# Altium PCB PCB_连接板_2_2022-10-20.pcbdoc
Units mil, origin at the board's own origin, x right, y up, seen from the top; angles counter-clockwise.
Board outline 5810 x 5730 mil, 2 copper layers (Top Layer, Bottom Layer); 67 components, 53 nets, 216 pads, 6 vias.
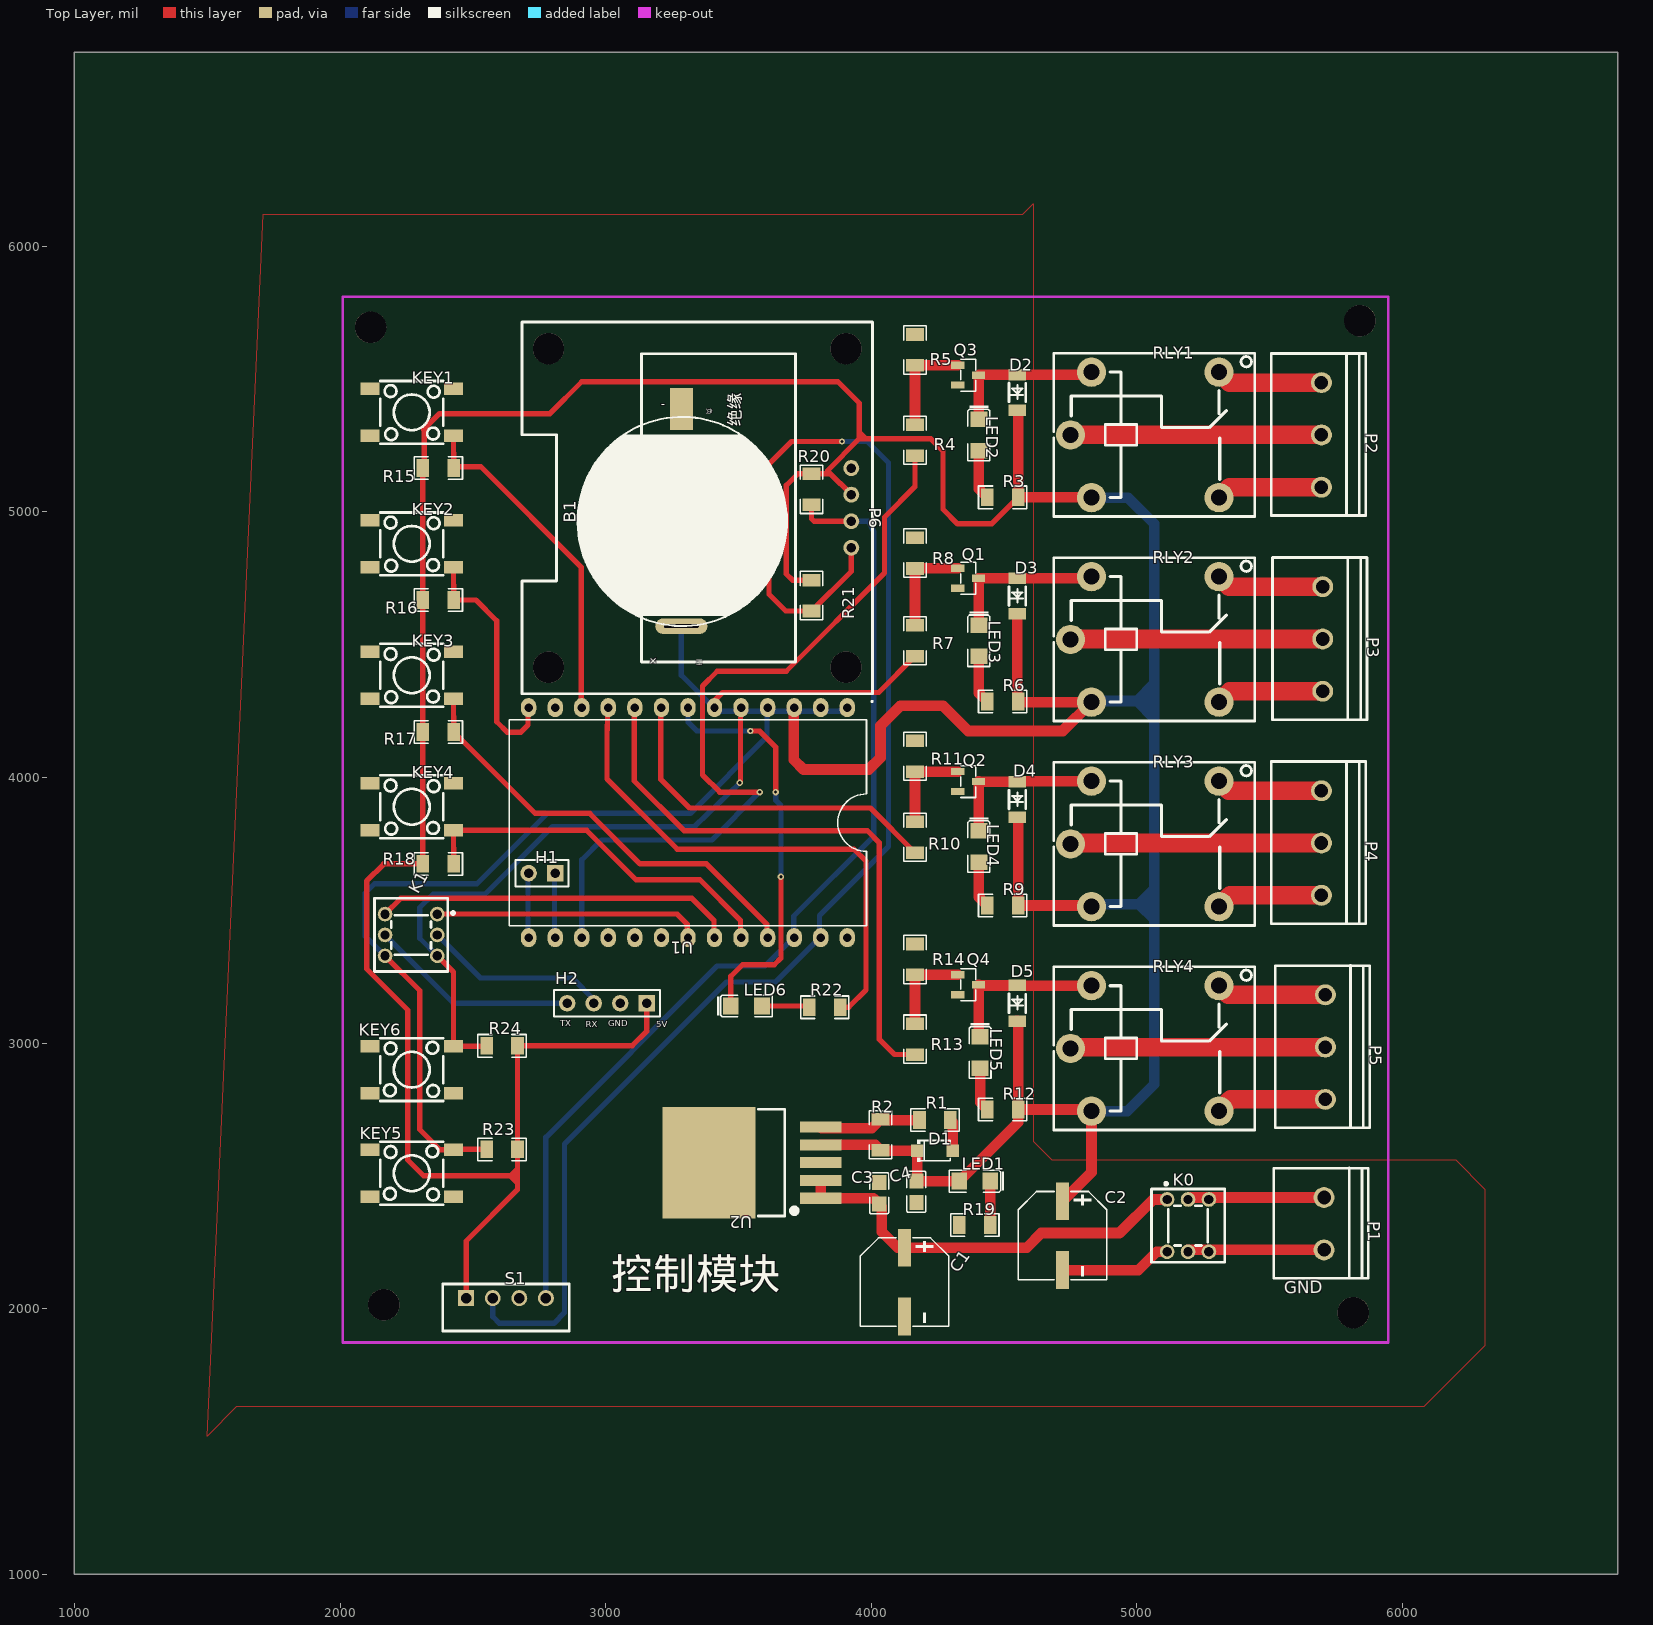
[diagram p0: Top Layer view]
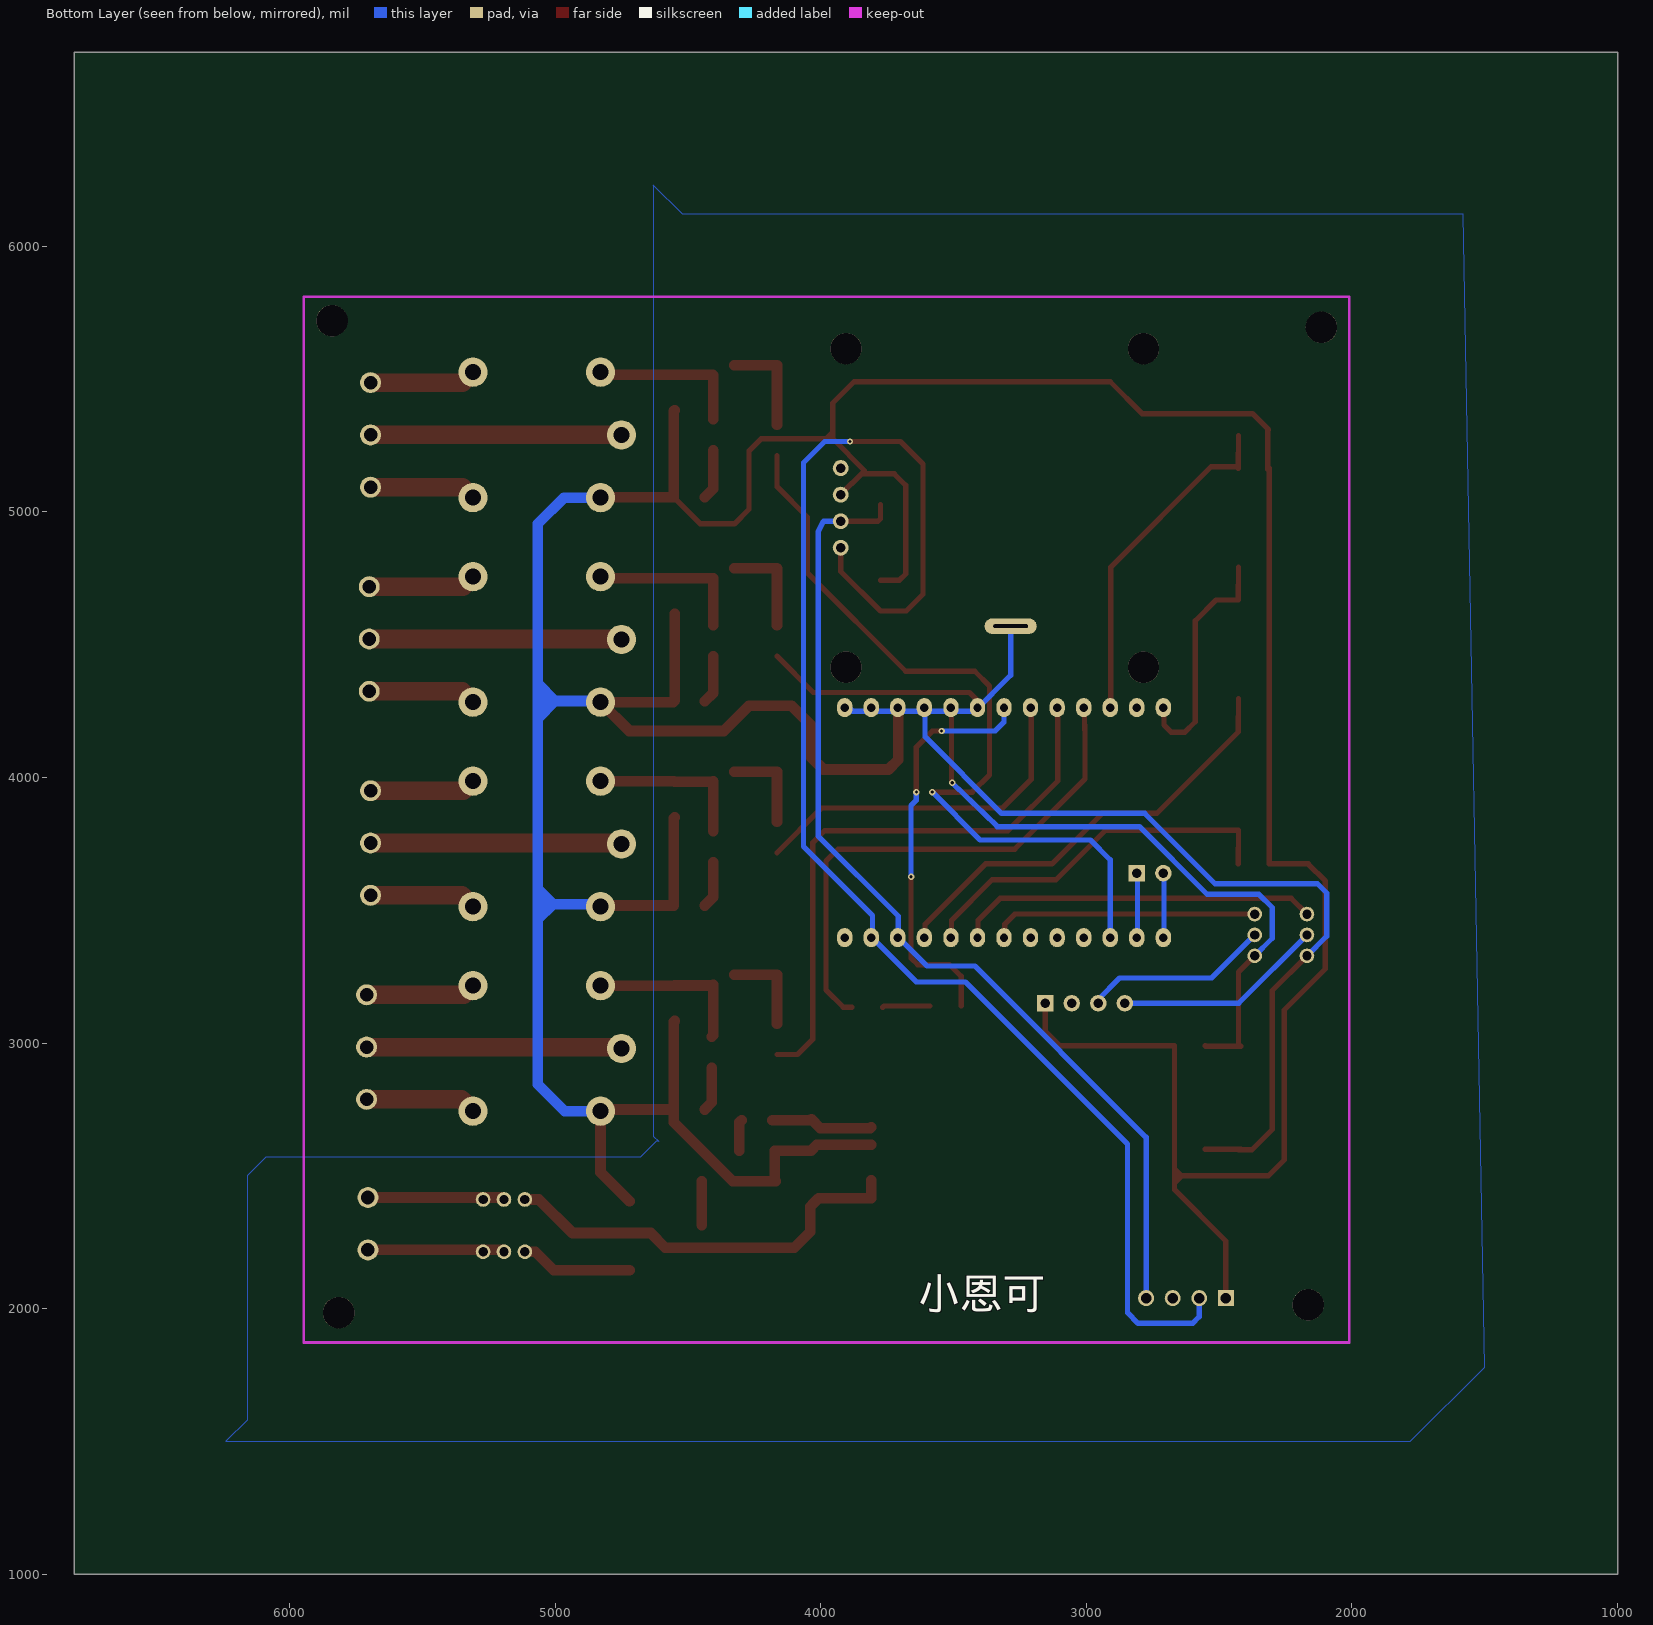
[diagram p1: Bottom Layer view, seen from below]

## Layer stack, top to bottom
Top Layer: signal copper (thickness not stored)
Dielectric: dielectric 12.6, FR-4, Dk 4.8
Bottom Layer: signal copper (thickness not stored)

## Board outline
6810,1000 1000,1000 1000,6730 6810,6730

## Components (designator, comment, footprint, x,y, rotation, side; value= is the part's Value field where it differs from the comment)
B1 "LIR2032-3.6V" LIR2032-3.6V 3285,4970 r90 top
C1 "470u" CAP-SMD_BD8.0-L8.3-W8.3-LS9.0-FD-A 4125,2100 r270 top
C2 "470u" CAP-SMD_BD8.0-L8.3-W8.3-LS9.0-FD-A 4720,2275 r270 top
C3 "100n" C0805 4030,2435 r90 top
C4 "100n" C0805 4170,2440 r270 top
D1 "5.1V" SMF_L2.8-W1.8-LS3.7-RD 4240,2595 r0 top
D2 "LL4148" LL-34_L3.5-W1.5-RD 4550,5450 r90 top
D3 "LL4148" LL-34_L3.5-W1.5-RD 4550,4683.33 r90 top
D4 "LL4148" LL-34_L3.5-W1.5-RD 4550,3916.67 r90 top
D5 "LL4148" LL-34_L3.5-W1.5-RD 4550,3150 r90 top
H1 "HDR-F-2.54_1x2" HDR-F-2.54_1X2 2760,3640 r180 top
H2 "串口" HDR-F-2.54_1X4 3005,3150 r180 top
K0 "BTSA-L-P-10" BTSA-L-P-10 5210,2340 r90 top
K1 "BTSA-L-P-10" BTSA-L-P-10 2295,3390 r0 top
KEY1 "6x6x6Plastic head" SW-SMD_4P-L6.0-W6.0-P4.50-LS8.6 2270,5375 r0 top
KEY2 "6x6x6Plastic head" SW-SMD_4P-L6.0-W6.0-P4.50-LS8.6 2270,4880 r0 top
KEY3 "6x6x6Plastic head" SW-SMD_4P-L6.0-W6.0-P4.50-LS8.6 2270,4385 r0 top
KEY4 "6x6x6Plastic head" SW-SMD_4P-L6.0-W6.0-P4.50-LS8.6 2270,3890 r0 top
KEY5 "6x6x6Plastic head" SW-SMD_4P-L6.0-W6.0-P4.50-LS8.6 2270.01,2510 r180 top
KEY6 "6x6x6Plastic head" SW-SMD_4P-L6.0-W6.0-P4.50-LS8.6 2270.01,2900 r180 top
LED1 "LED1206-R" LED1206-R-RD_RED 4390,2480 r180 top
LED2 "LED1206-R" LED1206-R-RD_RED 4405,5290 r270 top
LED3 "LED1206-R" LED1206-R-RD_RED 4405,4515 r270 top
LED4 "LED1206-R" LED1206-R-RD_RED 4405,3740 r270 top
LED5 "LED1206-R" LED1206-R-RD_RED 4410,2965 r270 top
LED6 "LED1206-R" LED1206-R-RD_RED 3530,3140 r0 top
P1 "CONN-TH_2P-P5.00" CONN-TH_2P-P5.00 5705,2320 r270 top
P2 "WJ300V-5.0-3P" CONN-TH_3P-P5.00_WJ300V-5.00-3P 5695,5290 r270 top
P3 "WJ300V-5.0-3P" CONN-TH_3P-P5.00_WJ300V-5.00-3P 5700,4521.67 r270 top
P4 "WJ300V-5.0-3P" CONN-TH_3P-P5.00_WJ300V-5.00-3P 5695,3753.33 r270 top
P5 "WJ300V-5.0-3P" CONN-TH_3P-P5.00_WJ300V-5.00-3P 5710,2985 r270 top
P6 "1.3 OLED" "1.3 OLED SSD1306 4P" 4005,5715 r270 top
Q1 "S9013" SOT-23-3_L2.9-W1.3-P1.90-LS2.4-BR 4365,4750 r180 top
Q2 "S9013" SOT-23-3_L2.9-W1.3-P1.90-LS2.4-BR 4365,3985 r180 top
Q3 "S9013" SOT-23-3_L2.9-W1.3-P1.90-LS2.4-BR 4365,5515 r180 top
Q4 "S9013" SOT-23-3_L2.9-W1.3-P1.90-LS2.4-BR 4365,3220 r180 top
R1 "30k" R1206 4240,2710 r180 top
R2 "100k" R1206 4035,2655 r270 top
R3 "220" R1206 4495,5055 r0 top
R4 "2K" R1206 4165,5270 r90 top
R5 "10K" R1206 4165,5610 r90 top
R6 "220" R1206 4495,4286.67 r0 top
R7 "2K" R1206 4165,4515 r90 top
R8 "10K" R1206 4165,4845 r90 top
R9 "220" R1206 4495,3518.33 r0 top
R10 "2K" R1206 4165,3775 r90 top
R11 "10K" R1206 4165,4080 r90 top
R12 "220" R1206 4495,2750 r0 top
R13 "2K" R1206 4165,3015 r90 top
R14 "10K" R1206 4165,3315 r90 top
R15 "1k" R1206 2370,5165 r180 top
R16 "1k" R1206 2370,4668.33 r180 top
R17 "1k" R1206 2370,4171.67 r180 top
R18 "1k" R1206 2370,3675 r180 top
R19 "1k" R1206 4390,2315 r0 top
R20 "3K" R1206 3775,5085 r270 top
R21 "3K" R1206 3775,4685 r270 top
R22 "220" R1206 3825,3135 r0 top
R23 "1k" R1206 2609.99,2600 r0 top
R24 "1k" R1206 2609.99,2990 r0 top
RLY1 "SRD-05VDC-SL-C" RELAY-TH_SRD-XXVDC-XL-C 5030,5290 r0 top
RLY2 "SRD-05VDC-SL-C" RELAY-TH_SRD-XXVDC-XL-C 5030,4520 r0 top
RLY3 "SRD-05VDC-SL-C" RELAY-TH_SRD-XXVDC-XL-C 5030,3750 r0 top
RLY4 "SRD-05VDC-SL-C" RELAY-TH_SRD-XXVDC-XL-C 5030,2980 r0 top
S1 "AM2320" SENSOR-TH_AM2320 2625,2040 r0 top
U1 "AIR202 S6" "AIR202 S6" 3310,3830 r180 top
U2 "MIC29302WU" TO-263-5_L10.2-W9.9-P1.70-LS14.4-TL 3600,2550 r180 top

## Footprints (in the part's own frame and the unit in brackets; to place one, negate y for a bottom-side part, rotate by r counter-clockwise, add the part's x,y. Pads: shape width x height; smd on the part's side, far side on the other; paste and mask are expansions set on the pad)
"1.3 OLED SSD1306 4P" [mil]
  round 60 hole 36: 1(550,-80) 2(650,-80) 3(750,-80) 4(850,-80)
  round 118.11 hole 118.11 unplated: ""(100,-100) ""(100,-1220) ""(1300,-100) ""(1300,-1220)
  Top Layer lines w10: 870.76,-80.74 cw(c851.07,-80.74) 831.38,-80.74 ; 870.76,-80.74 ccw(c851.07,-80.74) 831.38,-80.74 ; 870.76,-80.74 ccw(c851.07,-80.74) 831.38,-80.74 ; 870.76,-80.74 cw(c851.07,-80.74) 831.38,-80.74 ; 870.76,-80.74 ccw(c851.07,-80.74) 831.38,-80.74 ; 870.76,-80.74 cw(c851.07,-80.74) 831.38,-80.74 ; 870.76,-80.74 ccw(c851.07,-80.74) 831.38,-80.74 ; 870.76,-80.74 cw(c851.07,-80.74) 831.38,-80.74 ; 770.02,-80.74 ccw(c750.34,-80.74) 730.65,-80.74 ; 770.02,-80.74 cw(c750.34,-80.74) 730.65,-80.74 ; 770.02,-80.74 ccw(c750.34,-80.74) 730.65,-80.74 ; 770.02,-80.74 cw(c750.34,-80.74) 730.65,-80.74 ; 770.02,-80.74 ccw(c750.34,-80.74) 730.65,-80.74 ; 770.02,-80.74 cw(c750.34,-80.74) 730.65,-80.74 ; 770.02,-80.74 ccw(c750.34,-80.74) 730.65,-80.74 ; 770.02,-80.74 cw(c750.34,-80.74) 730.65,-80.74 ; 669.27,-80.74 ccw(c649.58,-80.74) 629.9,-80.74 ; 669.27,-80.74 cw(c649.58,-80.74) 629.9,-80.74 ; 669.27,-80.74 ccw(c649.58,-80.74) 629.9,-80.74 ; 669.27,-80.74 cw(c649.58,-80.74) 629.9,-80.74 ; 669.27,-80.74 ccw(c649.58,-80.74) 629.9,-80.74 ; 669.27,-80.74 cw(c649.58,-80.74) 629.9,-80.74 ; 669.27,-80.74 ccw(c649.58,-80.74) 629.9,-80.74 ; 669.27,-80.74 cw(c649.58,-80.74) 629.9,-80.74 ; 569.1,-80.74 ccw(c549.41,-80.74) 529.73,-80.74 ; 569.1,-80.74 cw(c549.41,-80.74) 529.73,-80.74 ; 569.1,-80.74 ccw(c549.41,-80.74) 529.73,-80.74 ; 569.1,-80.74 cw(c549.41,-80.74) 529.73,-80.74 ; 569.1,-80.74 ccw(c549.41,-80.74) 529.73,-80.74 ; 569.1,-80.74 cw(c549.41,-80.74) 529.73,-80.74 ; 569.1,-80.74 ccw(c549.41,-80.74) 529.73,-80.74 ; 569.1,-80.74 cw(c549.41,-80.74) 529.73,-80.74
  silkscreen extent 0,-1320 1400,0
"AIR202 S6" [mm]
  oval 1.462x1.828 hole 0.8: 1(-15.24,-11) 2(-12.7,-11) 3(-10.16,-11) 4(-7.62,-11) 5(-5.08,-11) 6(-2.54,-11) 7(0,-11) 8(2.54,-11) 9(5.08,-11) 10(7.62,-11) 11(10.16,-11) 12(12.7,-11) 13(15.24,-11) 14(15.24,11) 15(12.7,11) 16(10.16,11) 17(7.62,11) 18(5.08,11) 19(2.54,11) 20(0,11) 21(-2.54,11) 22(-5.08,11) 23(-7.62,11) 24(-10.16,11) 25(-12.7,11) 26(-15.24,11)
  silkscreen extent -17.68,-11.68 17.08,9.86
BTSA-L-P-10 [mm]
  round 1.4 hole 0.9: 1(1.809,2.437) 2(1.809,0.437) 3(1.809,-1.563) 4(-3.191,2.437) 5(-3.191,0.437) 6(-3.191,-1.563)
  silkscreen extent -4.19,-3.06 3.45,3.94
C0805 [mm]
  rect 1.41x1.35 smd: 1(-1.03,0) 2(1.03,0)
  silkscreen extent -1.96,-0.9 1.96,0.9
CAP-SMD_BD8.0-L8.3-W8.3-LS9.0-FD-A [mm]
  rect 3.61x1.26 smd: 1(-3.295,0) 2(3.295,0)
  silkscreen extent -4.23,-4.23 4.23,4.23
CONN-TH_2P-P5.00 [mm]
  round 2 hole 1.3: 1(-2.504,0) 2(2.504,0)
  silkscreen extent -5.32,-4.8 5.21,4.23
CONN-TH_3P-P5.00_WJ300V-5.00-3P [mm]
  round 2 hole 1.3: 1(-5,0) 2(0,0) 3(5,0)
  silkscreen extent -7.82,-4.8 7.71,4.23
HDR-F-2.54_1X2 [mil]
  rect 62x62 hole 35: 1(-50,0)
  round 62 hole 35: 2(50,0)
  silkscreen extent -100,-49 100,50
HDR-F-2.54_1X4 [mil]
  rect 62x62 hole 35: 1(-150,0)
  round 62 hole 35: 2(-50,0) 3(50,0) 4(150,0)
  silkscreen extent -200,-50 200,50
LED1206-R-RD_RED [mm]
  rect 1.485x1.62 smd: 1(1.493,0) 2(-1.492,0)
  silkscreen extent -2.77,-1.04 2.46,1.04
LIR2032-3.6V [mm]
  oval 1.5x5 hole 0.35 slot 3.3 at 90 deg: 1(-10.16,0)
  rect 4x2.2 smd: 2(10.6,0)
  silkscreen extent -10.15,-10.16 9.85,9.92
LL-34_L3.5-W1.5-RD [mm]
  rect 1.1x1.7 smd: 1(-1.7,0) 2(1.7,0)
  silkscreen extent -0.9,-0.8 0.9,0.8
R1206 [mil]
  rect 47.54x66.97 smd: 1(-58.22,0) 2(58.22,0)
  silkscreen extent -91,-42 91,42
RELAY-TH_SRD-XXVDC-XL-C [mil]
  round 110 hole 60: 1(-200.79,-236.22) 2(279.52,-236.2) 3(279.53,236.2) 4(-200.79,236.22) 5(-279.53,0)
  silkscreen extent -342,-307 413,307
SENSOR-TH_AM2320 [mil]
  rect 60x60 hole 39.37: 1(-150,0)
  round 60 hole 39.37: 2(-50,0) 3(50,0) 4(150,0)
  silkscreen extent -238,-124 238,53
SMF_L2.8-W1.8-LS3.7-RD [mm]
  rect 1.2x1.2 smd: 1(-1.685,0) 2(1.685,0)
  silkscreen extent -1.7,-1.05 1.48,1.05
SOT-23-3_L2.9-W1.3-P1.90-LS2.4-BR [mm]
  rect 1.25x0.7 smd: 1(1,-0.95) 2(1,0.95) 3(-1,0)
  silkscreen extent -0.73,-1.53 0.73,1.53
SW-SMD_4P-L6.0-W6.0-P4.50-LS8.6 [mm]
  rect 1.8x1.2 smd: 1(-4,2.25) 2(4,2.25) 3(-4,-2.25) 4(4,-2.25)
  silkscreen extent -3,-3 3,3
TO-263-5_L10.2-W9.9-P1.70-LS14.4-TL [mm]
  rect 4x1.069 smd: 1(-5.334,3.4) 2(-5.334,1.7) 3(-5.334,0) 4(-5.334,-1.7) 5(-5.334,-3.4)
  rect 8.89x10.66 smd: 6(5.334,0)
  silkscreen extent -3.05,-5.1 0.66,5.1

## Free pads (board coordinates)
  round 118.11 hole 118.11 unplated: ""(2115,5695) ""(2165,2015) ""(5815,1985) ""(5840,5720)

## Via types
v1: diameter 24, hole 12, Top Layer to Bottom Layer, tented both sides, 6 vias

## Nets (pads, with @x,y where several pads share a name; then routed paths per layer and width w, separated by ;. In a path a pad name is that pad's centre, name@x,y a point inside that pad or via, vN(x,y) a via of type N, cw(c..) or ccw(c..) an arc to the next point about the centre after c; other vN are vias at no path point)
+5V: C2.1 C4.1 D1.1 D2.1 D3.1 D4.1 D5.1 H2.1 LED1.1 P6.2 R2.2 R3.2 R6.2 R9.2 R12.2 R15.2 R16.2 R17.2 R18.2 R20.1 R21.1 R23.2 R24.2 RLY1.1 RLY2.1 RLY3.1 RLY4.1 S1.1 U1.3 U2.4 | length 18054.4
  Top Layer w20: R15.2 R18.2 2165,3675 2100,3610 2100,3280 2255,3125 2255,2560 2315,2500.4 2641.61,2500.4 ; R15.2@2317,5160 2317,5308.5 2314.9,5310 2374.9,5370 2789.9,5370 2909.9,5490 3874.9,5490 3954.9,5410 3954.9,5276 ; S1.1 2475,2255 2668.2,2448.2 R23.2 R24.2 3100,2990 3155,3045 H2.1 ; 2668.2,2472.74 2668.2,2473.81 2641.61,2500.4 ; 2668.2,2493 2649.01,2493 2641.61,2500.4 ; 2668.2,2518.79 2660.01,2518.79 2641.61,2500.4 ; 2668.2,2540.11 2668.2,2526.99 2641.61,2500.4 ; R21.1 3703.4,4743.2 3680,4766.6 3680,5100 3723.22,5143.22 R20.1 3846.78,5143.22 P6.2 3835,5155 3954.9,5276 ; 3954.9,5274.7 3954.9,5276 ; 3954.9,5301.8 3980.8,5275 3975.1,5275 ; 3960,5285 3954.9,5276 ; 3979.1,5275 3954.9,5276 ; R3.2 4453.2,4955 4325,4955 4270,5010 4270,5230 4225,5275 3954.9,5276
  Top Layer w40: U1.3@3707.71,4253.07 3707.71,4067.29 3745,4030 3990,4030 4035,4075 4035,4195 4110,4270 4270,4270 4365,4175 4720.43,4175 RLY2.1 4556.11,4283.78 R6.2 4550,4289.89 D3.1 ; U2.4 4014.86,2616.92 R2.2 4036.78,2595 D1.1 4173.65,2484.2 4170,2480.55 4170.55,2480 LED1.1 ; LED1.1 4553.2,2702 R12.2 ; D5.1 4553.22,3079.85 R12.2 ; D4.1 4553.22,3846.52 R9.2 4824.66,3518.33 RLY3.1 ; D2.1 4553.22,5379.85 R3.2 4827.99,5055 RLY1.1 ; C2.1 4829.21,2513.94 RLY4.1 4822.99,2750 R12.2
  Bottom Layer w40: RLY4.1 4963.8,2743.8 5065,2845 5065,4955.7 4966.9,5053.8 RLY1.1 ; RLY3.1 4837.6,3522.17 5065,3522.17 ; RLY2.1 4833.39,4287.96 5065,4287.96 ; 5006.77,3522.17 5065,3580.4 5065,3608.83 ; 5008.62,3522.17 5065,3465.79 5065,3431.05 ; 5065,4223.5 5001.5,4288 5065,4352.1
D2_2: D2.2 LED2.2 Q3.3 RLY1.4 | length 595.7
  Top Layer w40: Q3.3 4406.3,5516.93 D2.2 4819.92,5516.93 RLY1.4 ; Q3.3 LED2.2
GND: B1.2 C1.2 C2.2 C3.2 C4.2 D1.2 H2.2 K0.4 KEY1.2 KEY2.2 KEY3.2 KEY4.2 KEY5.1 KEY6.1 P6.1 Q1.2 Q2.2 Q3.2 Q4.2 R1.1 R5.2 R8.2 R11.2 R14.2 R19.1 S1.3 U1.2 U1.12 U1.26 U2.3 U2.6 | length 541
  Top Layer w40: R1.1 4306.34,2701.89 D1.2 ; C2.2 5005,2145.3 5074.4,2214.4 K0.4
GPIO2: KEY2.4 R16.1 U1.13 | length 898.5
  Top Layer w20: KEY2.4 R16.1 2511.7,4668.3 2590,4590 2590,4210 2630,4170 2680,4170 2707.7,4197.7 U1.13@2707.7,4253.1
GPIO3: KEY1.4 R15.1 U1.11 | length 1298.7
  Top Layer w20: KEY1.4 R15.1 2433.2,5170 2530,5170 2907.7,4792.3 U1.11@2907.71,4253.07
GPIO4: KEY4.4 R18.1 U1.22 | length 1411.6
  Top Layer w20: R18.1 KEY4.4 2928.6,3801.4 3115,3615 3355,3615 3507.7,3462.3 U1.22@3507.7,3397.8
GPIO5: KEY3.4 R17.1 U1.23 | length 1653.8
  Top Layer w20: KEY3.4 R17.1 2734.9,3865 2940,3865 3130,3675 3380,3675 3607.7,3447.3 U1.23@3607.7,3397.8
GPIO8: LED6.2 U1.7 | length 1555
  Top Layer w20: LED6.2 3471.24,3251.24 3515,3295 3635,3295 3660,3320 v1(3660,3626.26) ; v1(3545,4175) 3580,4175 3640,4115 v1(3640,3945)
  Bottom Layer w20: U1.7 3310,4208.6 3343.6,4175 v1(3545,4175) ; v1(3640,3945) 3640,3915 3660,3895 v1(3660,3626.26)
GPIO10: R7.1 U1.6 | length 861.9
  Top Layer w20: U1.6@3407.7,4253.1 3407.7,4287.7 3440,4320 4028.2,4320 R7.1
GPIO11: R10.1 U1.8 | length 1332.2
  Top Layer w20: U1.8@3207.7,4253.1 3207.7,3992.3 3315,3885 3996.8,3885 R10.1
GPIO12: R13.1 U1.9 | length 2183.4
  Top Layer w20: U1.9@3107.7,4253.1 3107.7,3987.3 3295,3800 3985,3800 4030,3755 4030,3015 4088.2,2956.8 R13.1
GPIO29: R4.1 U1.16 | length 2995.9
  Top Layer w20: v1(3580,3945) 3430,3945 3365,4010 3365,4344.6 3420.4,4400 3680,4400 4050,4770 4050,4980 4165,5095 R4.1
  Bottom Layer w20: U1.16 2910,3690 2985,3765 3400,3765 v1(3580,3945)
HOST_RX: K1.1 U1.20 | length 1007
  Top Layer w20: K1.1 3269.1,3485.9 3307.7,3447.3 U1.20@3307.7,3397.8
HOST_TX: K1.4 U1.21 | length 1361.6
  Top Layer w20: K1.4 2228.4,3545 3325,3545 3407.7,3462.3 U1.21@3407.7,3397.8
I2C3_SCL: P6.3 R20.2 S1.4 U1.24 | length 3817.9
  Top Layer w20: R20.2 3775,4974.5 3784.5,4965 P6.3
  Bottom Layer w20: S1.4 2775,2645 3420,3290 3600,3290 3707.7,3397.8 3707.7,3477.7 4010,3780 4010,4925 3990,4965 P6.3
I2C3_SDA: P6.4 R21.2 S1.2 U1.25 | length 5677.7
  Top Layer w20: v1(3890,5265) 3700,5265 3615,5180 3615,4690 3678.2,4626.8 R21.2 3925,4776.78 P6.4
  Bottom Layer w20: S1.2 2575,1970 2600,1945 2805,1945 2845,1985 2845,2620 3455,3230 3640,3230 3807.7,3397.8 3805,3400.5 3805,3480 4065,3740 4065,5185 3985,5265 v1(3890,5265)
LED1_2: LED1.2 R19.2 | length 165.2
  Top Layer w40: R19.2 4448.77,2315.55 LED1.2
LED3_1: LED3.1 R6.1 | length 182.7
  Top Layer w40: LED3.1 4405,4318.45 R6.1
LED3_2: D3.2 LED3.2 Q1.3 RLY2.4 | length 603.5
  Top Layer w40: LED3.2 Q1.3 D3.2 ; D3.2 4823.25,4750.26 RLY2.4
LED4_1: LED4.1 R9.1 | length 176.1
  Top Layer w40: LED4.1 4405,3550.11 R9.1
LED4_2: D4.2 LED4.2 Q2.3 RLY3.4 | length 612.7
  Top Layer w40: Q2.3 4405.77,3983.6 D4.2 4552.62,3986.22 RLY3.4 ; Q2.3 LED4.2
LED5_1: LED5.1 R12.1 | length 167.3
  Top Layer w40: LED5.1 4410,2776.78 R12.1
LED5_2: D5.2 LED5.2 Q4.3 RLY4.4 | length 624.7
  Top Layer w40: LED5.2 4404.37,3029.39 Q4.3 4407.44,3216.93 D5.2 ; D5.2 RLY4.4
P1_1: K0.2 K0.3 P1.1 | length 515.3
  Top Layer w40: K0.2 5200.17,2418.6 P1.1
P1_2: K0.5 K0.6 P1.2 | length 519.2
  Top Layer w40: K0.5 5192.8,2221.4 P1.2
P2_1: P2.1 RLY1.3 | length 401.8
  Top Layer w70: RLY1.3 5348.88,5486.85 P2.1
P2_2: P2.2 RLY1.5 | length 944.5
  Top Layer w70: RLY1.5 P2.2
P2_3: P2.3 RLY1.2 | length 401.8
  Top Layer w70: RLY1.2 5348.88,5093.15 P2.3@5695,5093.15
Q1_1: Q1.1 R7.2 R8.1 | length 374.2
  Top Layer w40: R7.2 R8.1 Q1.1
Q2_1: Q2.1 R10.2 R11.1 | length 349.2
  Top Layer w40: R10.2 R11.1 Q2.1
Q4_1: Q4.1 R13.2 R14.1 | length 344.2
  Top Layer w40: R13.2 R14.1 Q4.1
R2_1: R1.2 R2.1 U2.5 | length 388.4
  Top Layer w40: U2.5 3813.8,2680 4001.8,2680 R2.1 4038.22,2710 R1.2
R3_1: LED2.1 R3.1 | length 189.4
  Top Layer w40: LED2.1 4405,5086.78 R3.1
R5_1: Q3.1 R4.2 R5.1 | length 384.2
  Top Layer w40: R4.2 R5.1 Q3.1
R22_1: LED6.1 R22.1 | length 180.1
  Top Layer w20: LED6.1 3761.78,3140 R22.1
RLY2_2: P3.3 RLY2.2 | length 407.5
  Top Layer w70: RLY2.2 5350.55,4324.82 P3.3
RLY2_3: P3.1 RLY2.3 | length 406.1
  Top Layer w70: RLY2.3 5347.21,4718.52 P3.1
RLY2_5: P3.2 RLY2.5 | length 950.2
  Top Layer w70: RLY2.5 4752.14,4521.67 P3.2
RLY3_2: P4.3 RLY3.2 | length 403.1
  Top Layer w70: RLY3.2 5352.21,3556.48 P4.3
RLY3_3: P4.1 RLY3.3 | length 400.4
  Top Layer w70: RLY3.3 5345.55,3950.18 P4.1
RLY3_5: P4.2 RLY3.5 | length 945.9
  Top Layer w70: RLY3.5 4753.8,3753.33 P4.2
RLY4_2: P5.3 RLY4.2 | length 418.8
  Top Layer w70: RLY4.2 5353.88,2788.15 P5.3@5710,2788.15
RLY4_3: P5.1 RLY4.3 | length 414.7
  Top Layer w70: RLY4.3 5343.88,3181.85 P5.1
RLY4_5: P5.2 RLY4.5 | length 961.6
  Top Layer w70: RLY4.5 4755.47,2985 P5.2
RX: H2.3 K1.2 | length 704.1
  Bottom Layer w20: K1.2 2528.43,3245 2875,3245 2955,3165 H2.3
RX1: K1.3 KEY6.3 R24.1 U1.5 | length 2352.3
  Top Layer w20: K1.3 2427.49,3267.2 KEY6.3 ; KEY6.3@2417.47,2988.58 2550.35,2988.58 R24.1 ; v1(3505,3980) 3507.7,3982.7 3507.7,4223.9
  Bottom Layer w20: K1.3 2300,3394.7 2300,3510 2350,3560 2545,3560 2800,3815 3335,3815 v1(3505,3980)
SPEAKER+: H1.1 U1.15 | length 243.2
  Bottom Layer w20: U1.15@2807.71,3397.76 2807.71,3637.71 H1.1
SPEAKER-: H1.2 U1.14 | length 243.2
  Bottom Layer w20: U1.14@2707.71,3397.76 2707.71,3637.71 H1.2
TX: H2.4 K1.5 | length 792.2
  Bottom Layer w20: K1.5 2426.58,3150 H2.4
TX1: K1.6 KEY5.3 R23.1 U1.4 | length 3120.7
  Top Layer w20: K1.6 2300,3197.8 2300,2675 2376.4,2598.6 KEY5.3 ; KEY5.3@2417.47,2598.58 2418.89,2600 R23.1
  Bottom Layer w20: K1.6 2095,3402.8 2095,3565 2130,3600 2515,3600 2780,3865 3319,3865 3607.71,4153.71 U1.4@3607.71,4248.9
VBAT: B1.1 U1.1 | length 899.1
  Bottom Layer w20: B1.1 3285,4385 3420,4250 3880.4,4250 3907.7,4277.3 U1.1@3907.7,4253.1
VCC_IN: C1.1 C3.1 K0.1 U2.1 U2.2 | length 1645.6
  Top Layer w20: U2.1 U2.2
  Top Layer w40: U2.2 U2.1 4008.29,2416.16 4030,2394.45 4040,2384.45 4040,2290 4100.27,2229.73 C1.1 4584.73,2229.73 4585,2230 4640,2285 4935,2285 5061.23,2411.23 K0.1
VDDIO: R22.2 U1.10 | length 1970.2
  Top Layer w20: U1.10@3007.71,4253.07 3005,4150.9 3005,3995 3270,3730 3935,3730 3980,3685 3980,3200 3915,3135 R22.2
pads on no net: KEY1.1 KEY1.3 KEY2.1 KEY2.3 KEY3.1 KEY3.3 KEY4.1 KEY4.3 KEY5.2 KEY5.4 KEY6.2 KEY6.4 P6. U1.17 U1.18 U1.19

## Polygon pours and split planes (outlines as drawn)
GND on Bottom Layer (solid): 1580,6120 4520,6120 4630,6230 4630,2650 4610,2630 4620,2630 4680,2570 6090,2570 6160,2500 6160,1580 6240,1500 1780,1500 1500,1780
GND on Top Layer (solid): 1710,6120 4570,6120 4610,6160 4610,2630 4680,2560 6200,2560 6310,2450 6310,1860 6080,1630 1610,1630 1500,1520

## Silkscreen, mask and mechanical layers (free items; w line width, h text height)
Top Overlay:
  text "TX" at 2830,3055 h40
  text "GND" at 3010,3055 h40
  text "RX" at 2925,3050 h40
  text "5V" at 3190,3050 h40
  text "GND" at 5555,2040 h80 r1
  text "控制模块" at 3020,2035 h200
Bottom Overlay:
  text "小恩可" at 3635,1960 h200

## Text inside footprints (layer, text, board x,y; h text height)
B1: Top Overlay "+" at 3183.86,4461.14 h31.5 r225; Top Overlay "-" at 3225,5415.75 h31.5 r180; Top Overlay "负" at 3375,5390 h31.5 r270; Top Overlay "正" at 3365,4450 h31.5 r180; Top Overlay "绝缘" at 3525,5320 h80 r90